# Altium PCB PCB1.PcbDoc
Units mil, origin at the board's own origin, x right, y up, seen from the top; angles counter-clockwise.
Board outline 6000 x 4000 mil, 2 copper layers (Top Layer, Bottom Layer); 95 components, 45 nets, 328 pads, 40 vias.
Unrouted connection lines stored in the file: 4.
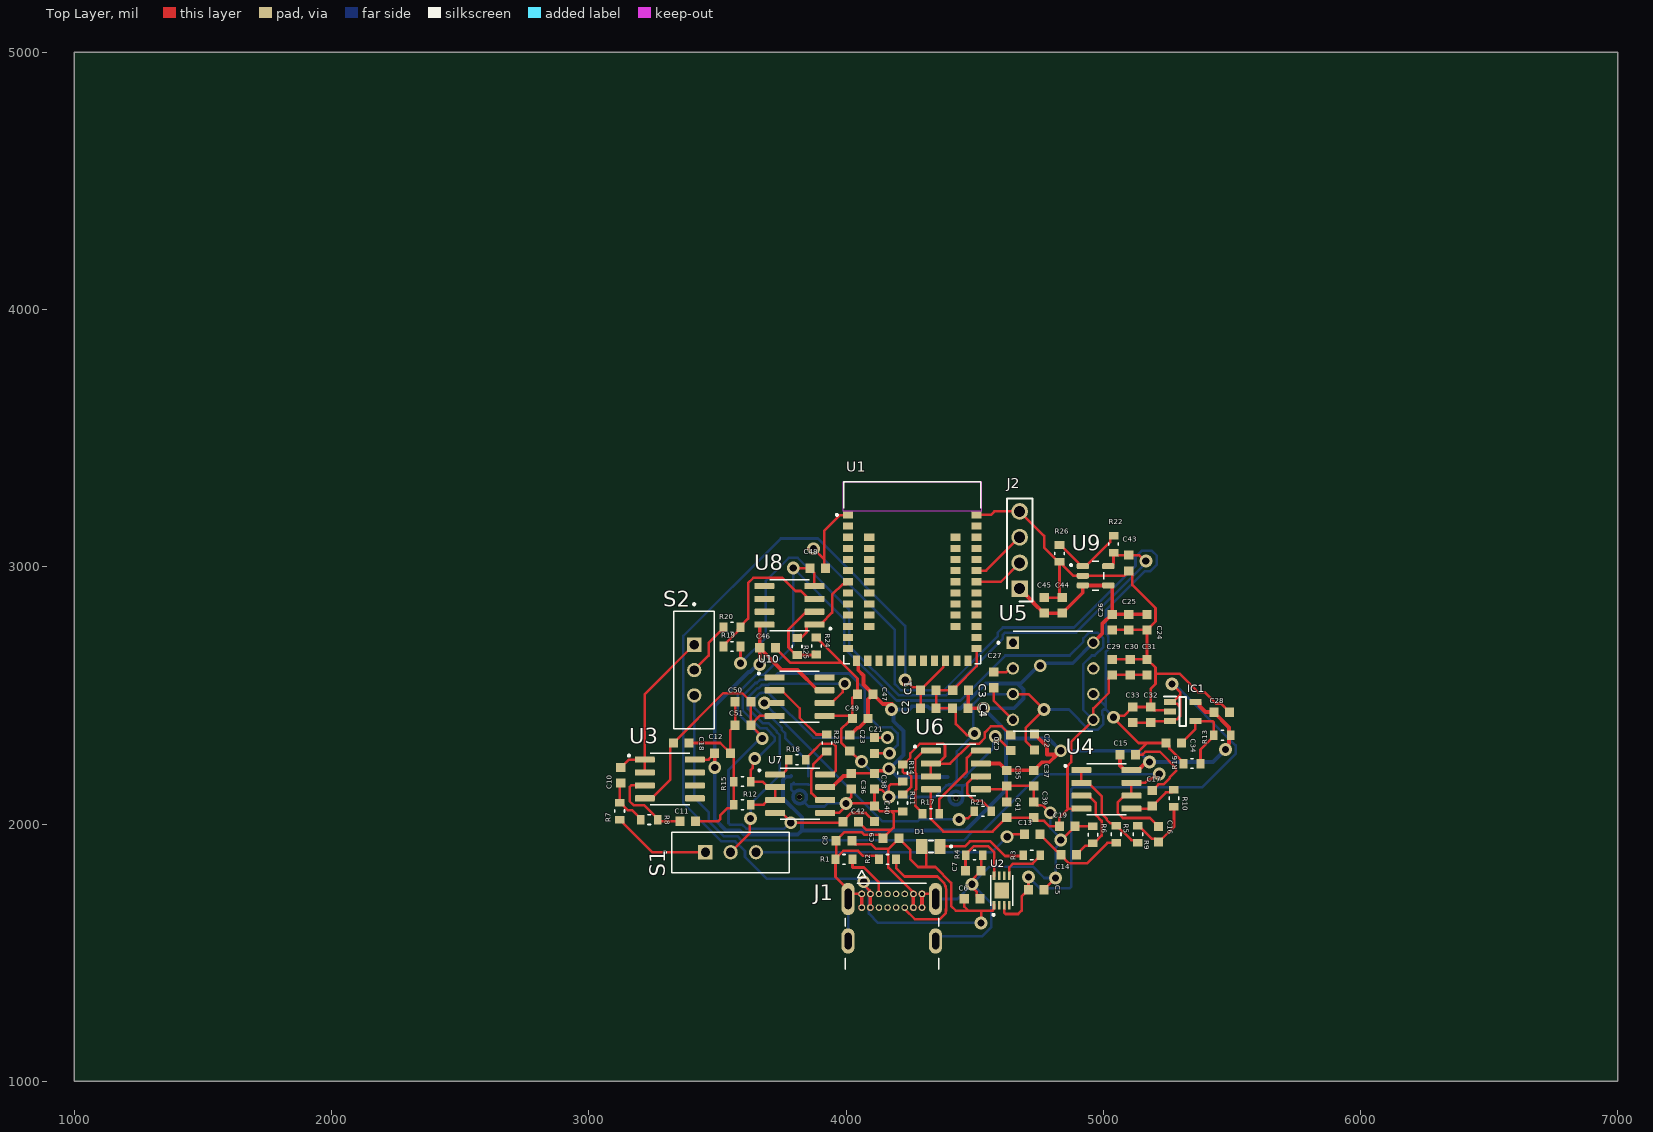
[diagram p0: Top Layer view]
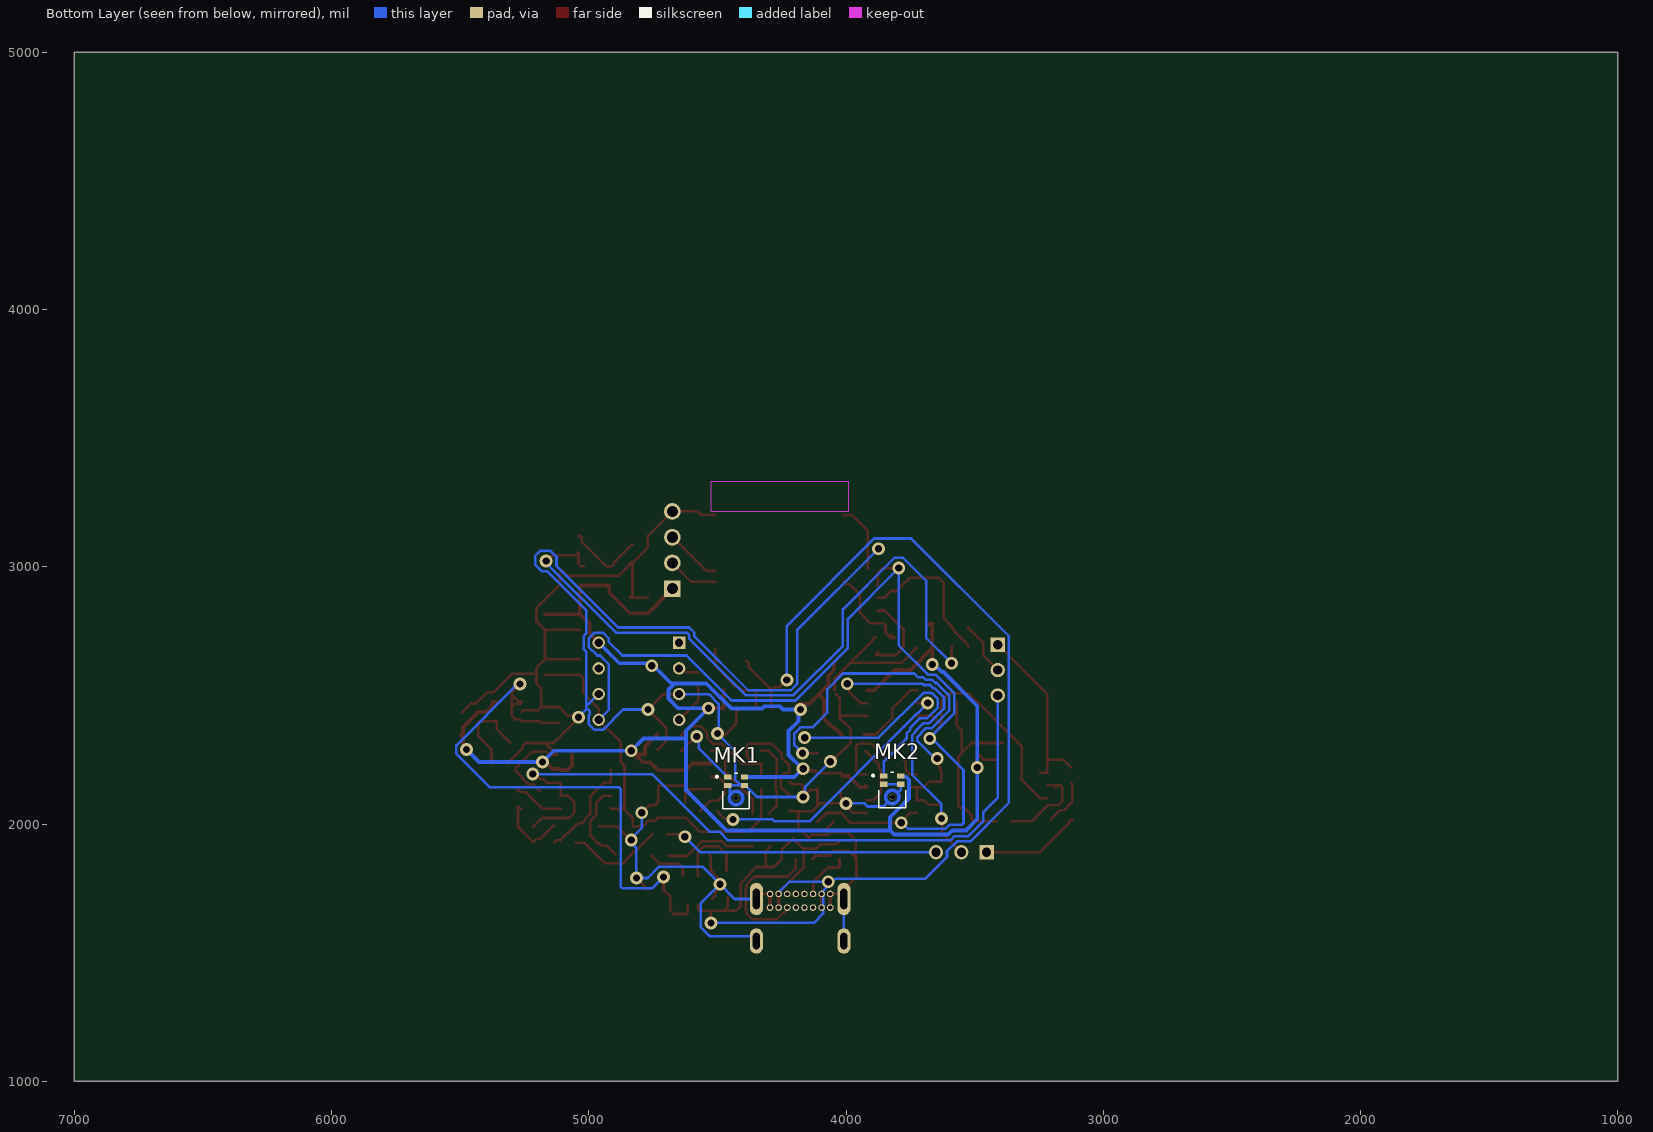
[diagram p1: Bottom Layer view, seen from below]
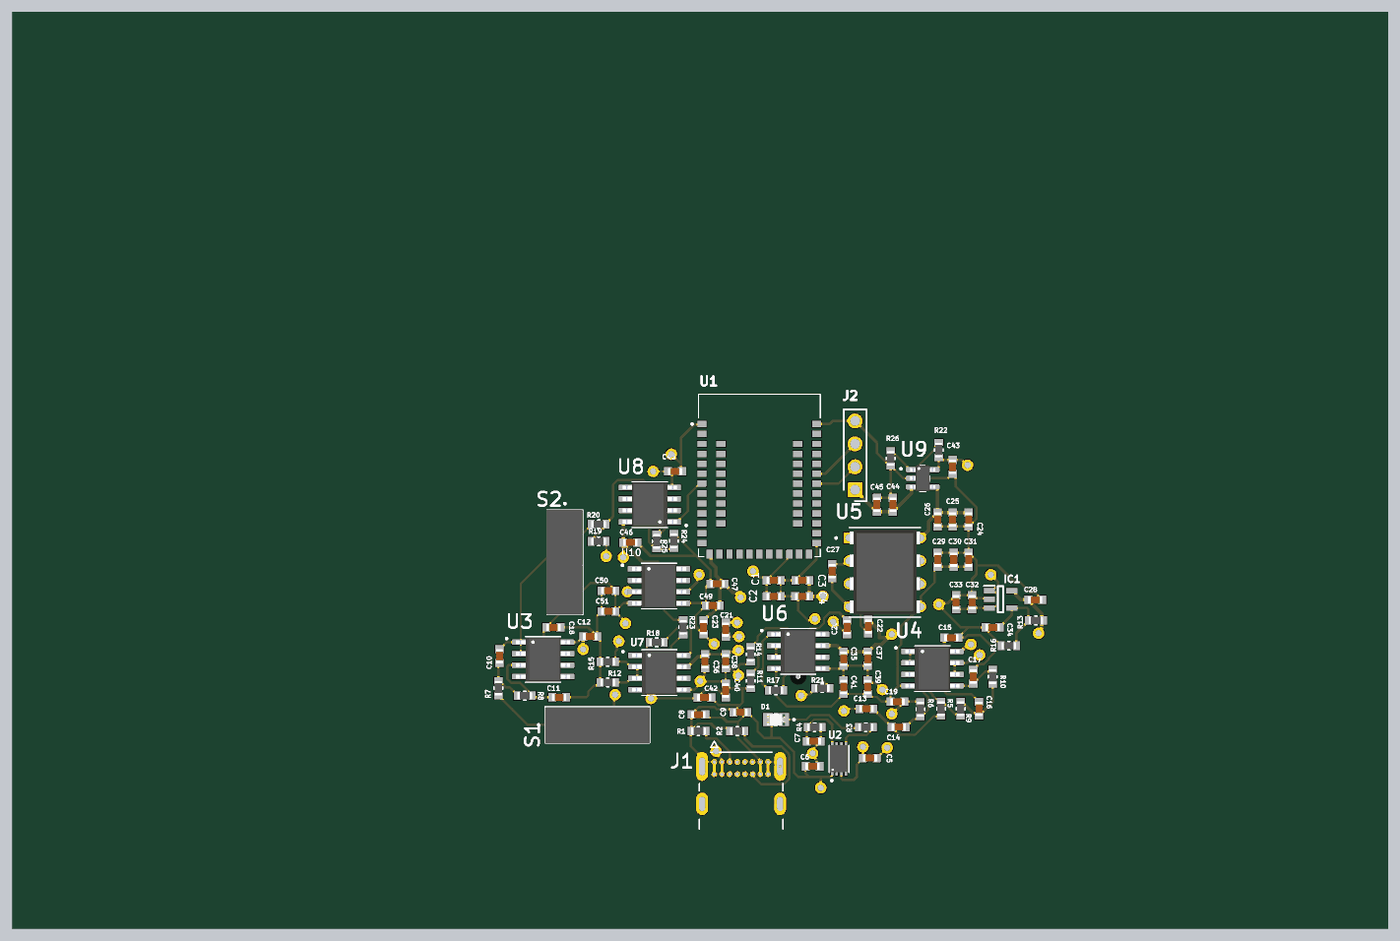
[diagram p2: 3D render of the assembled board from above, using the file's embedded part models]

## Layer stack, top to bottom
Top Solder: solder mask 0.4, Solder Resist, Dk 3.5
Top Layer: signal copper 1.4
Dielectric 1: dielectric 12.6, FR-4, Dk 4.8
Bottom Layer: signal copper 1.4
Bottom Solder: solder mask 0.4, Solder Resist, Dk 3.5

## Board outline
1000,1000 7000,1000 7000,5000 1000,5000

## Design rules (kind name [scope] priority, off if disabled: settings)
Clearance [All] p1: gap=10 ignorepadtopadclearanceinfootprint=FALSE
PolygonConnect [All] p1: connectstyle=Relief reliefconductorwidth=10 reliefentries=4 polygonreliefangle="90 Angle" airgapwidth=10
RoutingVias [All] p1: holewidth=28 width=50 viastyle="Through Hole" minholewidth=28 minwidth=50 maxholewidth=28 maxwidth=50
SolderMaskExpansion [All] p1: expansion=4 istentingtop=FALSE
SupplyNets "Schematic Supply Nets_5" [InNet('VDD_3.3V')] p1: voltage=0.000
SupplyNets "Schematic Supply Nets_4" [InNet('V_USB')] p2: voltage=0.000
SupplyNets "Schematic Supply Nets_3" [InNet('GND')] p3: voltage=0.000
SupplyNets "Schematic Supply Nets_2" [InNet('Ref')] p4: voltage=0.000
SupplyNets "Schematic Supply Nets_1" [InNet('V_BATT')] p5: voltage=0.000
SupplyNets "Schematic Supply Nets" [InNet('VDD_-3.3V')] p6: voltage=0.000
Width PowerN3.3 [InNet('VDD_3.3V')] p1: maxlimit=30 minlimit=15 preferedwidth=20 minimp=50.000000 maximp=50.000000 favimp=50.000000
Width Width_1 [All] p2: maxlimit=10 minlimit=10 preferedwidth=10
Width Power3.3 [InNet('VDD_3.3V')] p3: maxlimit=30 minlimit=15 preferedwidth=20 minimp=50.000000 maximp=50.000000 favimp=50.000000
30 further rules are at their usual default settings.

## Components (designator, comment, footprint, x,y, rotation, side; value= is the part's Value field where it differs from the comment)
C1 "1uF" CAPC1608X90N 4320.31,2520 r180 top
C2 "1uF" CAPC1608X90N 4320.31,2450 r180 top
C3 "1uF" CAPC1608X90N 4445.31,2520 r0 top
C4 "4.7uF" CAPC1608X90N 4444.69,2450 r0 top
C5 "4.7uF" CAPC1608X90N 4739.69,1745 r0 top
C6 "4.7uF" CAPC1608X90N 4490.04,1709.13 r180 top
C7 "10nF" CAPC1608X90N 4495,1818.29 r180 top
C8 "1uF" CAPC1608X90N 3992.3,1935 r0 top
C9 "1uF" CAPC1608X90N 4175,1945 r0 top
C10 "220nF" CAPC1608X90N 3125,2189.68 r270 top
C11 "100nF" CAPC1608X90N 3385,2010 r180 top
C12 "0.1uF" CAPC1608X90N 3520,2275 r180 top
C13 "10nF" CAPC1608X90N 4724.69,1960 r180 top
C14 "10nF" CAPC1608X90N 4865.31,1880 r180 top
C15 "10nF" CAPC1608X90N 5095,2270 r180 top
C16 "10nF" CAPC1608X90N 5215,1960 r90 top
C17 "10nF" CAPC1608X90N 5190,2100 r90 top
C18 "0.1uF" CAPC1608X90N 3360,2315 r0 top
C19 "10nF" CAPC1608X90N 4859.69,1991 r180 top
C20 "2.2uF" CAPC1608X90N 4640,2315.32 r270 top
C21 "2.2uF" CAPC1608X90N 4110.74,2305.32 r90 top
C22 "100nF" CAPC1608X90N 4732.72,2318.7 r90 top
C23 "100nF" CAPC1608X90N 4014.68,2315 r90 top
C24 "10uF" CAPC1608X90N 5170,2785 r90 top
C25 "10uF" CAPC1608X90N 5100,2785 r90 top
C26 "10uF" CAPC1608X90N 5035,2785 r90 top
C27 "10uF" CAPC1608X90N 4575,2560 r90 top
C28 "1uF" CAPC1608X90N 5460.31,2435 r0 top
C29 "10uF" CAPC1608X90N 5035,2610 r270 top
C30 "10uF" CAPC1608X90N 5105,2610 r270 top
C31 "10uF" CAPC1608X90N 5170,2610 r270 top
C32 "1uF" CAPC1608X90N 5185,2424.49 r90 top
C33 "10uF" CAPC1608X90N 5115,2424.49 r90 top
C34 "470pF" CAPC1608X90N 5274.69,2315 r180 top
C35 "1uF" CAPC1608X90N 4625,2178.41 r270 top
C36 "1uF" CAPC1608X90N 4021.13,2166.83 r270 top
C37 "0.1uF" CAPC1608X90N 4730,2178.41 r270 top
C38 "0.1uF" CAPC1608X90N 4110.74,2166.83 r270 top
C39 "1uF" CAPC1608X90N 4730,2054.68 r90 top
C40 "1uF" CAPC1608X90N 4110.74,2039.68 r90 top
C41 "0.1uF" CAPC1608X90N 4625,2054.68 r90 top
C42 "0.1uF" CAPC1608X90N 4017.96,2009.37 r0 top
C43 "0.022uF" CAPC1608X90N 5100,3014.68 r270 top
C44 "10uF" CAPC1608X90N 4840,2849.68 r90 top
C45 "1uF" CAPC1608X90N 4770,2849.68 r90 top
C46 "0.1uF" CAPC1608X90N 3695,2685 r180 top
C47 "1uF" CAPC1608X90N 4075,2505 r180 top
C48 "0.1uF" CAPC1608X90N 3890,2995 r180 top
C49 "0.1uF" CAPC1608X90N 4055,2410 r180 top
C50 "1uF" CAPC1608X90N 3599.68,2475 r180 top
C51 "0.1uF" CAPC1608X90N 3599.68,2384.68 r180 top
D1 "LED" LEDC2012X70N 4330,1912.71 r180 top
IC1 "MIC5219YM5-TR" SOT95P280X145-5N#1 5309.21,2437.4 r0 top
J1 "2137160001" MOLEX_2137160001 4178.27,1426.97 r0 top
J2 "90120-0764" HDRV4W90P0X254_1X4_994X249X560P 4675,2915 r90 top
MK1 "MP23ABS1TR" MIC_MP23ABS1TR 4427.34,2128.66 r180 bottom
MK2 "MP23ABS1TR" MIC_MP23ABS1TR 3820,2132.95 r180 bottom
R1 "5.1k" RESC1608X60N 3992.3,1862.4 r180 top
R2 "5.1k" RESC1608X60N 4161.54,1862.4 r0 top
R3 "470" RESC1608X60N 4722,1879.21 r180 top
R4 "2k" RESC1608X60N 4499,1879.21 r0 top
R5 "3.3k" RESC1608X60N 5050,1960 r270 top
R6 "3.3k" RESC1608X60N 4960,1958 r270 top
R7 "2.2k" RESC1608X60N 3120,2050 r270 top
R8 "3.3k" RESC1608X60N 3235,2017 r180 top
R9 "3.3k" RESC1608X60N 5135,1960 r270 top
R10 "3.3k" RESC1608X60N 5275,2100 r270 top
R11 "100k" RESC1608X60N 4220,2082 r270 top
R12 "100k" RESC1608X60N 3597,2075 r180 top
R13 "9.1k" RESC1608X60N 5463,2345 r180 top
R14 "100k" RESC1608X60N 4220,2198 r90 top
R15 "100k" RESC1608X60N 3597,2165 r0 top
R16 "15k" RESC1608X60N 5345,2235 r180 top
R17 "12k" RESC1608X60N 4330,2040.26 r0 top
R18 "12k" RESC1608X60N 3810,2250 r0 top
R19 "10k" RESC1608X60N 3557,2690 r180 top
R20 "1k" RESC1608X60N 3557,2765 r180 top
R21 "100k" RESC1608X60N 4532,2050 r0 top
R22 "2.4k" RESC1608X60N 5040,3088 r90 top
R23 "100k" RESC1608X60N 3925.85,2315 r90 top
R24 "1k" RESC1608X60N 3885,2692 r90 top
R25 "10k" RESC1608X60N 3810,2690 r270 top
R26 "6.5k" RESC1608X60N 4830,3052 r270 top
S1 "MINI-SPDT-SW" SW_MINI-SPDT-SW 3551.57,1890 r0 top
S2 "MINI-SPDT-SW" SW_MINI-SPDT-SW 3410,2598.43 r270 top
U1 "HOLYIOT-18010-NRF52840" XCVR_HOLYIOT-18010-NRF52840 4257.68,2977.05 r0 top
U2 "MCP73831-2ACI/MC" SON50P200X300X100-9N 4605.16,1741.5 r90 top
U3 "TL082CD" SOIC127P599X175-8N 3315,2175 r0 top
U4 "TL082CD" SOIC127P599X175-8N 5012.24,2135 r0 top
U5 "ICL7660EPA+" DIP794W47P254L991H457Q8 4805,2555 r0 top
U6 "INA818IDR" SOIC127P599X175-8N 4427.24,2210 r0 top
U7 "INA818IDR" SOIC127P599X175-8N 3821.93,2118.09 r0 top
U8 "TL082CD" SOIC127P599X175-8N 3780,2850 r180 top
U9 "LM4121IM5-ADJ/NOPB" SOT95P280X145-5N#2 4970,2965 r0 top
U10 "INA818IDR" SOIC127P599X175-8N 3820,2495 r0 top

## Footprints (in the part's own frame and the unit in brackets; to place one, negate y for a bottom-side part, rotate by r counter-clockwise, add the part's x,y. Pads: shape width x height; smd on the part's side, far side on the other; paste and mask are expansions set on the pad)
CAPC1608X90N [mm]
  rect 0.89x0.93 smd: 1(-0.77,0) 2(0.77,0)
  body extent -0.8,-0.4 0.8,0.4, height 0.9
DIP794W47P254L991H457Q8 [mm]
  rect 1.22x1.22 / inner round 1.22 / far side rect 1.22x1.22 hole 0.81: 1(-3.97,3.81)
  round 1.22 hole 0.81: 2(-3.97,1.27) 3(-3.97,-1.27) 4(-3.97,-3.81) 5(3.97,-3.81) 6(3.97,-1.27) 7(3.97,1.27) 8(3.97,3.81)
  silkscreen extent -5.51,-4.96 3.94,4.96, body extent -3.91,-4.69 3.91,4.69, height 4.57
HDRV4W90P0X254_1X4_994X249X560P [mm]
  rect 1.65x1.65 hole 1.1: 1(0,0)
  round 1.65 hole 1.1: 2(2.54,0) 3(5.08,0) 4(7.62,0)
  silkscreen extent -1.27,-1.27 8.89,1.27
LEDC2012X70N [mm]
  rect 1.1x1.45 smd: A(0.9,0) C(-0.9,0)
  silkscreen extent -2.1,-0.6 0.2,0.6, body extent -1,-0.63 1,0.63, height 0.7
MIC_MP23ABS1TR [mm]
  rect 0.725x0.522 smd paste-1: 1(-0.837,1.364) 2(-0.837,0.542) 4(0.837,0.542) 5(0.837,1.364)
  rect 0.1x0.1 smd paste-1 mask+0: 3(0,-1.372)
  round 0.5 hole 0.5 unplated mask+0.662: ""(0,-0.71)
  Top Layer region: 242 vertices and 0 holes, not listed, extent -0.813,-1.522 0.813,0.102
  silkscreen extent -2,-1.75 1.33,1.75, body extent -1.33,-1.75 1.33,1.75, height 1.08
MOLEX_2137160001 [mm]
  round 0.648 hole 0.4 mask+0.064: A1(-2.975,7.65) A4(-2.125,7.65) A5(-1.275,7.65) A6(-0.425,7.65) A7(0.425,7.65) A8(1.275,7.65) A9(2.125,7.65) A12(2.975,7.65) B1(2.975,6.3) B4(2.125,6.3) B5(1.275,6.3) B6(0.425,6.3) B7(-0.425,6.3) B8(-1.275,6.3) B9(-2.125,6.3) B12(-2.975,6.3)
  oval 1.3x2.5 hole 0.7 slot 1.6 at 90 deg mask+0.064: SH1(-4.32,3) SH2(4.32,3)
  oval 1.3x3.2 hole 0.7 slot 2 at 90 deg mask+0.064: SH3(-4.32,7.15) SH4(4.32,7.15)
  Top Layer region: -2.918,7.969 -2.863,7.954 -2.811,7.929 -2.764,7.896 -2.724,7.855 -2.692,7.808 -2.669,7.756 -2.655,7.7 -2.651,7.643 -2.657,7.586 -2.673,7.531 -2.699,7.48 -2.733,7.434 -2.775,7.395 -2.825,7.363 -2.825,6.587 -2.775,6.555 -2.733,6.516 -2.699,6.47 -2.673,6.419 -2.657,6.364 -2.651,6.307 -2.655,6.25 -2.669,6.194 -2.692,6.142 -2.724,6.095 -2.764,6.054 -2.811,6.021 -2.863,5.996 -2.918,5.981 -2.975,5.976 -3.032,5.981 -3.087,5.996 -3.139,6.021 -3.186,6.054 -3.226,6.095 -3.258,6.142 -3.281,6.194 -3.295,6.25 -3.299,6.307 -3.293,6.364 -3.277,6.419 -3.251,6.47 -3.217,6.516 -3.175,6.555 -3.125,6.587 -3.125,7.363 -3.175,7.395 -3.217,7.434 -3.251,7.48 -3.277,7.531 -3.293,7.586 -3.299,7.643 -3.295,7.7 -3.281,7.756 -3.258,7.808 -3.226,7.855 -3.186,7.896 -3.139,7.929 -3.087,7.954 -3.032,7.969 -2.975,7.974
  Top Layer region: -2.068,7.969 -2.013,7.954 -1.961,7.929 -1.914,7.896 -1.874,7.855 -1.842,7.808 -1.819,7.756 -1.805,7.7 -1.801,7.643 -1.807,7.586 -1.823,7.531 -1.849,7.48 -1.883,7.434 -1.925,7.395 -1.975,7.363 -1.975,6.587 -1.925,6.555 -1.883,6.516 -1.849,6.47 -1.823,6.419 -1.807,6.364 -1.801,6.307 -1.805,6.25 -1.819,6.194 -1.842,6.142 -1.874,6.095 -1.914,6.054 -1.961,6.021 -2.013,5.996 -2.068,5.981 -2.125,5.976 -2.182,5.981 -2.237,5.996 -2.289,6.021 -2.336,6.054 -2.376,6.095 -2.408,6.142 -2.431,6.194 -2.445,6.25 -2.449,6.307 -2.443,6.364 -2.427,6.419 -2.401,6.47 -2.367,6.516 -2.325,6.555 -2.275,6.587 -2.275,7.363 -2.325,7.395 -2.367,7.434 -2.401,7.48 -2.427,7.531 -2.443,7.586 -2.449,7.643 -2.445,7.7 -2.431,7.756 -2.408,7.808 -2.376,7.855 -2.336,7.896 -2.289,7.929 -2.237,7.954 -2.182,7.969 -2.125,7.974
  Top Layer region: 2.182,7.969 2.237,7.954 2.289,7.929 2.336,7.896 2.376,7.855 2.408,7.808 2.431,7.756 2.445,7.7 2.449,7.643 2.443,7.586 2.427,7.531 2.401,7.48 2.367,7.434 2.325,7.395 2.275,7.363 2.275,6.587 2.325,6.555 2.367,6.516 2.401,6.47 2.427,6.419 2.443,6.364 2.449,6.307 2.445,6.25 2.431,6.194 2.408,6.142 2.376,6.095 2.336,6.054 2.289,6.021 2.237,5.996 2.182,5.981 2.125,5.976 2.068,5.981 2.013,5.996 1.961,6.021 1.914,6.054 1.874,6.095 1.842,6.142 1.819,6.194 1.805,6.25 1.801,6.307 1.807,6.364 1.823,6.419 1.849,6.47 1.883,6.516 1.925,6.555 1.975,6.587 1.975,7.363 1.975,7.363 1.925,7.395 1.883,7.434 1.849,7.48 1.823,7.531 1.807,7.586 1.801,7.643 1.805,7.7 1.819,7.756 1.842,7.808 1.874,7.855 1.914,7.896 1.961,7.929 2.013,7.954 2.068,7.969 2.125,7.974
  Top Layer region: 3.032,7.969 3.087,7.954 3.139,7.929 3.186,7.896 3.226,7.855 3.258,7.808 3.281,7.756 3.295,7.7 3.299,7.643 3.293,7.586 3.277,7.531 3.251,7.48 3.217,7.434 3.175,7.395 3.125,7.363 3.125,6.587 3.175,6.555 3.217,6.516 3.251,6.47 3.277,6.419 3.293,6.364 3.299,6.307 3.295,6.25 3.281,6.194 3.258,6.142 3.226,6.095 3.186,6.054 3.139,6.021 3.087,5.996 3.032,5.981 2.975,5.976 2.918,5.981 2.863,5.996 2.811,6.021 2.764,6.054 2.724,6.095 2.692,6.142 2.669,6.194 2.655,6.25 2.651,6.307 2.657,6.364 2.673,6.419 2.699,6.47 2.733,6.516 2.775,6.555 2.825,6.587 2.825,7.363 2.775,7.395 2.733,7.434 2.699,7.48 2.673,7.531 2.657,7.586 2.651,7.643 2.655,7.7 2.669,7.756 2.692,7.808 2.724,7.855 2.764,7.896 2.811,7.929 2.863,7.954 2.918,7.969 2.975,7.974
  silkscreen extent -4.62,0.23 4.62,9.95
RESC1608X60N [mil]
  rect 30x37 smd: 1(-33,0) 2(33,0)
  silkscreen extent -5,-19 5,19, body extent -31,-16 31,16, height 22
SOIC127P599X175-8N [mm]
  rrect25% 1.97x0.6 smd: 1(-2.47,1.905) 2(-2.47,0.635) 3(-2.47,-0.635) 4(-2.47,-1.905) 5(2.47,-1.905) 6(2.47,-0.635) 7(2.47,0.635) 8(2.47,1.905)
  silkscreen extent -4.14,-2.52 1.95,2.52, body extent -3,-2.45 3,2.45, height 1.75
SON50P200X300X100-9N [mm]
  rrect7% 0.84x0.27 smd: 1(-1.435,0.75) 2(-1.435,0.25) 3(-1.435,-0.25) 4(-1.435,-0.75) 5(1.435,-0.75) 6(1.435,-0.25) 7(1.435,0.25) 8(1.435,0.75)
  rect 1.625x1.425 smd paste-2: 9(0,0)
  silkscreen extent -2.5,-1.1 1.5,1.1, body extent -1.5,-1 1.5,1, height 1
SOT95P280X145-5N#1 [mm]
  rect 1.2x0.6 smd: 1(-1.25,0.95) 2(-1.25,0) 3(-1.25,-0.95) 4(1.25,-0.95) 5(1.25,0.95)
  silkscreen extent -1.85,-1.45 0.3,1.5
SOT95P280X145-5N#2 [mm]
  rrect50% 1.21x0.59 smd: 1(-1.255,0.95) 2(-1.255,0) 3(-1.255,-0.95) 4(1.255,-0.95) 5(1.255,0.95)
  silkscreen extent -2.51,-1.45 0.8,1.45, body extent -1.4,-1.45 1.4,1.45, height 1.45
SW_MINI-SPDT-SW [mm]
  rect 1.408x1.408 hole 0.9: 1(-2.5,0)
  round 1.408 hole 0.9: 2(0,0) 3(2.5,0)
  silkscreen extent -6.6,-2 5.8,2, body extent -5.8,-2.03 5.8,1.97, height 7.4
XCVR_HOLYIOT-18010-NRF52840 [mm]
  rect 1x0.7 smd: 1(-6.35,5.7) 2(-6.35,4.6) 3(-6.35,3.5) 4(-6.35,2.4) 5(-6.35,1.3) 6(-6.35,0.2) 7(-6.35,-0.9) 8(-6.35,-2) 9(-6.35,-3.1) 10(-6.35,-4.2) 11(-6.35,-5.3) 12(-6.35,-6.4) 13(-6.35,-7.5) 25(6.35,-7.5) 26(6.35,-6.4) 27(6.35,-5.3) 28(6.35,-4.2) 29(6.35,-3.1) 30(6.35,-2) 31(6.35,-0.9) 32(6.35,0.2) 33(6.35,1.3) 34(6.35,2.4) 35(6.35,3.5) 36(6.35,4.6) 37(6.35,5.7) 38(-4.25,3.5) 39(-4.25,2.4) 40(-4.25,1.3) 41(-4.25,0.2) 42(-4.25,-0.9) 43(-4.25,-2) 44(-4.25,-3.1) 45(-4.25,-4.2) 46(-4.25,-5.3) 47(4.25,3.5) 48(4.25,2.4) 49(4.25,1.3) 50(4.25,0.2) 51(4.25,-0.9) 52(4.25,-2) 53(4.25,-3.1) 54(4.25,-4.2) 55(4.25,-5.3)
  rect 0.7x1 smd: 14(-5.5,-8.7) 15(-4.4,-8.7) 16(-3.3,-8.7) 17(-2.2,-8.7) 18(-1.1,-8.7) 19(0,-8.7) 20(1.1,-8.7) 21(2.2,-8.7) 22(3.3,-8.7) 23(4.4,-8.7) 24(5.5,-8.7)
  Keep-Out Layer region: 6.8,6.05 -6.8,6.05 -6.8,9 6.8,9
  Keep-Out Layer region: 6.8,6.05 -6.8,6.05 -6.8,9 6.8,9
  silkscreen extent -7.54,-9 6.75,9

## Part data
C1 C2 C3 C4 C5 C6 C7 C8 C9 C10 C11 C12 C13 C14 C15 C16 C17 C18 C19 C20 C21 C22 C23 C24 C25 C26 C27 C28 C29 C30 C31 C32 C33 C34 C35 C36 C37 C38 C39 C40 C41 C42 C43 C44 C45 C46 C47 C48 C49 C50 C51: library part CL10B104KB8NNNC, "0.1 ÂµF Â±10% 50V Ceramic Capacitor X7R 0603 (1608 Metric)", Package="1608-2 SAMSUNG", Check_prices=https://www.snapeda.com/parts/CL10B104KB8NNNC/Samsung/view-part/?ref=eda, MF="Samsung Electro-Mechanics", MP=CL10B104KB8NNNC, SnapEDA_Link=https://www.snapeda.com/parts/CL10B104KB8NNNC/Samsung/view-part/?ref=snap
D1: library part 597-5411-407F, "SMD LED 0805 YG 7", Package="0805 Dialight", Check_prices=https://www.snapeda.com/parts/597-5411-407F/Dialight/view-part/?ref=eda, MF=Dialight, MP=597-5411-407F, SnapEDA_Link=https://www.snapeda.com/parts/597-5411-407F/Dialight/view-part/?ref=snap
IC1: "Integrated Circuit", Manufacturer_Name=Microchip, Mouser Part Number=998-MIC5219YM5TR, Arrow Part Number=MIC5219YM5-TR, Arrow Price/Stock=https://www.arrow.com/en/products/mic5219ym5-tr/microchip-technology?utm_currency=USD&region=nac, Datasheet Link=http://www.microchip.com/mymicrochip/filehandler.aspx?ddocname=en579712, Height=1.45mm, Manufacturer_Part_Number=MIC5219YM5-TR, Mouser Price/Stock=https://www.mouser.co.uk/ProductDetail/Microchip-Technology/MIC5219YM5-TR?qs=U6T8BxXiZAWfHDmqF70%2FoQ%3D%3D
J1: "USB-C (USB TYPE-C) USB 2.0 Receptacle Connector 24 (16+8 Dummy) Position Through Hole, Right Angle", Package=None, Check_prices=https://www.snapeda.com/parts/2137160001/Molex/view-part/?ref=eda, MF=Molex, MP=2137160001, SnapEDA_Link=https://www.snapeda.com/parts/2137160001/Molex/view-part/?ref=snap
J2: "Connector", Manufacturer_Name=Molex, Mouser Part Number=538-90120-0764, Datasheet Link=https://www.molex.com/webdocs/datasheets/pdf/en-us/0901200764_PCB_HEADERS.pdf, Height=5.6mm, Manufacturer_Part_Number=90120-0764, Mouser Price/Stock=https://www.mouser.co.uk/ProductDetail/Molex/90120-0764?qs=QSnLD11VNirsMTdnHEPG3Q%3D%3D
MK1 MK2: "35 Hz ~ 1.5 kHz Analog Microphone MEMS (Silicon) Omnidirectional (-38dB Â±1dB @ 94dB SPL) Solder Pads", Package=None, Check_prices=https://www.snapeda.com/parts/MP23ABS1TR/STMicroelectronics/view-part/?ref=eda, MF=STMicroelectronics, MP=MP23ABS1TR, SnapEDA_Link=https://www.snapeda.com/parts/MP23ABS1TR/STMicroelectronics/view-part/?ref=snap
R1 R2 R3 R4 R5 R6 R7 R8 R9 R10 R11 R12 R13 R14 R15 R16 R17 R18 R19 R20 R21 R22 R23 R24 R25 R26: library part RC0603FR-0751RL, "51 Ohms Â±1% 0.1W, 1/10W Chip Resistor 0603 (1608 Metric) Moisture Resistant Thick Film", Package="0603-2 YAGEO", Check_prices=https://www.snapeda.com/parts/RC0603FR0751RL/Yageo/view-part/?ref=eda, MF="Yageo Corporation", MP=RC0603FR0751RL, SnapEDA_Link=https://www.snapeda.com/parts/RC0603FR0751RL/Yageo/view-part/?ref=snap
S1 S2: "Simple breadboard friendly SPDT slide switch. Rated at 30V/200mA with operating force of 250 +/-100gf.", Package=None, Availability=Unavailable, MP=MINI-SPDT-SW, Price=None
U1: "Holyiot 18010 Nordic nRF52840 module Bluetooth low energy module", Package=Package, Check_prices=https://www.snapeda.com/parts/HOLYIOT-18010-NRF52840/Holyiot/view-part/?ref=eda, MF=Holyiot, MP=HOLYIOT-18010-NRF52840, SnapEDA_Link=https://www.snapeda.com/parts/HOLYIOT-18010-NRF52840/Holyiot/view-part/?ref=snap
U2: "Charge Controller Li-Ion/Li-Pol 15mA to 500mA 4.2V 8-Pin DFN EP", Package="VFDFN-8 Microchip", Check_prices=https://www.snapeda.com/parts/MCP73831-2ACI/MC/Microchip/view-part/?ref=eda, MF=Microchip, MP=MCP73831-2ACI/MC, SnapEDA_Link=https://www.snapeda.com/parts/MCP73831-2ACI/MC/Microchip/view-part/?ref=snap
U3 U4 U8: "Dual, 30-V, 3-MHz, 13-V/Âµs slew rate, In to V+, JFET-input op amp", Package="SOIC-8 Texas Instruments", Check_prices=https://www.snapeda.com/parts/TL082CD/Texas+Instruments/view-part/?ref=eda, MF="Texas Instruments", MP=TL082CD, SnapEDA_Link=https://www.snapeda.com/parts/TL082CD/Texas+Instruments/view-part/?ref=snap
U5: "Switched-Capacitor Voltage Converters", Package="PDIP-8 Maxim", Availability="In Stock", Check_prices=https://www.snapeda.com/parts/ICL7660EPA+/Analog+Devices/view-part/?ref=eda, MF="Analog Devices", MP=ICL7660EPA+, Price=None, Purchase-URL=https://pricing.snapeda.com/search/part/ICL7660EPA+/?ref=eda, SnapEDA_Link=https://www.snapeda.com/parts/ICL7660EPA+/Analog+Devices/view-part/?ref=snap
U6 U7 U10: "Low power (350-ÂµA), precision instrumentation amp with Â±60-V overvoltage protection (gain pins 1, 8)", Package="SOIC-8 Texas Instruments", Check_prices=https://www.snapeda.com/parts/INA818IDR/Texas+Instruments/view-part/?ref=eda, MF="Texas Instruments", MP=INA818IDR, SnapEDA_Link=https://www.snapeda.com/parts/INA818IDR/Texas+Instruments/view-part/?ref=snap
U9: "Fixed & adjustable-voltage, 0.2% 50-ppm/Â°C drift precision series voltage reference with enable pin", Package="SOT-23-5 Texas Instruments", Check_prices=https://www.snapeda.com/parts/LM4121IM5-ADJ/NOPB/Texas+Instruments/view-part/?ref=eda, MF="Texas Instruments", MP=LM4121IM5-ADJ/NOPB, SnapEDA_Link=https://www.snapeda.com/parts/LM4121IM5-ADJ/NOPB/Texas+Instruments/view-part/?ref=snap

## Via types
v1: diameter 50, hole 28, Top Layer to Bottom Layer, 40 vias

## Nets (pads, with @x,y where several pads share a name; then routed paths per layer and width w, separated by ;. In a path a pad name is that pad's centre, name@x,y a point inside that pad or via, vN(x,y) a via of type N, cw(c..) or ccw(c..) an arc to the next point about the centre after c; other vN are vias at no path point)
+IN1: C20.1 R11.1 R14.2 U6.2 U6.3 | length 892.3
  Top Layer w10: R11.1 4223.5,2115 4243.5,2135 4244.71,2135 4253.5,2143.79 4253.5,2186.21 4241.72,2198 4225.86,2198 4220,2203.86 R14.2 ; R14.2@4223.5,2231 4250,2257.5 4250,2275.07 4286.74,2311.81 4378.19,2311.81 4385,2305 4385,2263.03 U6.2@4356.97,2235 ; U6.3 U6.2 U6.2@4356.97,2235 ; C20.1 4639.21,2345.63 4604.84,2380 4563.43,2380 4540,2356.57 4540,2335.24 4516.57,2311.81 4481.22,2311.81 4404.41,2235 U6.2@4356.97,2235
+IN2: C21.1 R12.1 R15.2 U7.2 U7.3 | length 1661.9
  Top Layer w10: R12.1 3679.63,2075 3697.72,2093.09 U7.3 U7.2 ; v1(3645,2255) 3637.35,2247.35 3637.35,2217.35 3630,2210 R15.2 3675.81,2165 3697.72,2143.09 U7.2 ; U7.2@3751.65,2143.09 U7.2 ; C21.1 v1(4169.37,2275)
  Bottom Layer w10: v1(3645,2255) 3654.06,2255 3723.14,2324.08 3723.14,2336.72 3710,2349.85 3710,2352.68 3690.87,2371.81 3667.57,2371.81 3599.07,2440.31 3599.07,2499.69 3647.55,2548.16 3652.64,2548.16 3664.79,2560.32 3689.54,2560.32 3699.22,2570 3719.23,2570 3734.23,2585 4011.57,2585 4072.89,2523.68 4072.89,2432.74 4130,2375.63 4177.2,2375.63 4200.63,2352.2 4200.63,2306.26 v1(4169.37,2275)
"+IN SUB": R21.2 U6.6 | length 265.8
  Top Layer w10: U6.6@4510.43,2178.19 U6.6@4517.24,2185 ; R21.2 4565,2053.5 4527.4,2091.1 4498.31,2091.1 4470.71,2118.71 4470.71,2158.19 U6.6@4497.52,2185 ; U6.6@4497.52,2185 U6.6 U6.6@4517.24,2185 ; U6.6@4497.52,2185 U6.6@4517.24,2185
"-IN SUB": R23.1 U7.6 | length 254.1
  Top Layer w10: U7.6 3892.2,2093.09 3865.39,2119.9 3865.39,2209.39 3873,2216.99 3873,2232.65 3922.35,2282 R23.1
GND: C1.1 C2.1 C3.1 C4.1 C5.2 C6.1 C7.1 C8.1 C9.1 C11.1 C12.1 C15.1 C17.2 C18.2 C19.1 C22.1 C23.1 C24.1 C25.1 C26.1 C28.2 C29.1 C30.1 C31.1 C32.2 C33.2 C34.2 C35.2 C36.2 C37.2 C38.2 C39.2 C40.2 C41.2 C42.2 C43.2 C44.2 C45.2 C46.1 C47.2 C48.1 C49.2 C50.2 C51.2 IC1.2 J1.A1 J1.A12 J1.B1 J1.B12 J1.SH1 J1.SH2 J1.SH3 J1.SH4 J2.4 MK1.2 MK1.3 MK1.4 MK2.2 MK2.3 MK2.4 R1.2 R2.1 R4.2 R6.1 R11.2 R12.2 R14.1 R15.1 R16.2 R24.2 R26.2 U1.1 U1.25 U1.37 U2.6 U5.3 U5.6 U6.5 U7.5 U9.2 U10.5 | length 14584.8
  Top Layer w10: C18.2 3511.1,2315 C12.1@3550.32,2275.79 ; C11.1 3502.5,2010 3511.57,2019.07 3511.57,2034.29 3538.79,2061.5 3554,2061.5 R12.2@3564,2071.5 ; R12.2 R15.1 3564,2260.53 3550.32,2274.21 C12.1 C12.1@3550.32,2275.79 ; C50.2 C51.2 3569.37,2383.9 3550.32,2364.84 C12.1@3550.32,2275.79 ; C46.1 3725.32,2684.21 3782.53,2627 3983,2627 ; v1(3873.86,3070) 3915.63,3028.23 ; R24.2 3888.5,2725 3898.5,2715 3898.5,2711.5 3983,2627 ; C48.1@3915.63,2995 3915.63,3028.23 ; U10.5 4014.68,2420 C49.2 ; U7.5 3973.27,2043.09 4000,2069.82 v1(4000,2080) ; U1.1@4007.68,3200.24 4008.9,3200.24 4009.13,3200 3975,3200 3915.63,3140.63 3915.63,3028.23 ; J1.SH3 4008.19,1745.87 3959.3,1794.75 R1.2 ; J1.SH3@4008.19,1709.13 4027.21,1728.15 J1.A1 ; C36.2 4020,2135.39 4020,2104.34 4000,2084.34 v1(4000,2080) ; C47.2@4039.37,2505 4024.68,2490.32 C49.2 ; C47.2@4044.68,2520.47 4044.68,2565.32 3983,2627 ; C42.2 4048.28,2008.58 4080.01,1976.85 4175.75,1976.85 ; v1(4060.88,2242.33) 4057.83,2242.33 4015.47,2284.68 4013.9,2284.68 3981.38,2317.2 3981.38,2369.05 4009.02,2396.69 4012.17,2396.69 4024.68,2409.21 C49.2 ; R2.1 4128.54,1865.9 4118.54,1875.9 4066.52,1875.9 4046.52,1895.9 3989.3,1895.9 3959.3,1865.9 R1.2 ; C9.1 C9.1@4144.69,1945.79 ; R11.2 4176.26,2049 ; R14.1 4210,2155 4174.51,2155 4166.52,2147 v1(4166.5,2105) 4138.22,2133.29 4113.97,2133.29 C38.2 C40.2 ; J1.A12 4329.32,1728.15 4348.35,1709.13 J1.SH4 ; v1(4500,2351.81) 4493.82,2345.63 4469.69,2345.63 4426.89,2388.43 4426.89,2437.48 C4.1 C2.1 C1.1 4405,2520 4418.31,2533.31 4427.67,2533.31 4507.68,2613.31 U1.25 ; U1.37 4563.54,3201.46 4577.09,3215 J2.4 4770,3120 4770,3075.5 4826.5,3019 R26.2 ; C7.1@4520.31,1814.08 C7.1@4525.31,1819.08 ; C6.1 4507.83,1721.65 4507.83,1737.25 4490.04,1755.05 v1(4490.04,1765.87) 4490.04,1766.52 4481.79,1774.77 C7.1 4525.31,1872.53 R4.2 ; U6.5 4611.12,2135 4624.21,2148.09 C35.2 ; C41.2 C35.2 ; U5.3 4710,2505 v1(4770,2445) 4699.41,2374.41 4699.41,2320.91 4731.93,2288.39 C22.1 ; C5.2 v1(4815,1790) ; C45.2 C44.2 4830,2890 R26.2 ; v1(4794.07,2043.53) 4765.12,2072.48 4742.52,2072.48 C39.2 C37.2 C35.2 ; v1(4835,1937.69) 4837.48,1937.69 4890,1990.21 C19.1 R6.1 ; C29.1 C30.1 C31.1 ; C26.1 C25.1 C24.1 ; C17.2 5190.79,2130.32 5214.69,2154.21 5234.45,2154.21 5257.89,2177.64 5257.89,2181.32 5284.67,2208.11 5284.67,2216.39 5220.14,2280.92 5163.66,2280.92 5152.74,2270 C15.1 5125.31,2270.79 5137.83,2283.31 5138.62,2283.31 5170.31,2315 ; IC1.2 5255.12,2442.28 5198.31,2442.28 5185.79,2454.8 C32.2 ; R16.2 5312,2238.5 5256.89,2293.61 5256.89,2302.48 C34.2 5170.31,2315 ; C28.2 5490.63,2435.79 5458.11,2468.31 5438.53,2468.31 5394.13,2512.71 5368.87,2512.71 5297.06,2584.52 5208.15,2584.52 5203.31,2579.68 ; R1.2 3961.99,1865.09 C8.1 3961.99,1935.79 3994.51,1968.31 4060.53,1968.31 4070.53,1958.31 4132.17,1958.31 C9.1@4144.69,1945.79 ; v1(4000,2080) 4100.74,2080 C40.2 ; C40.2 4111.53,2070 4132.53,2049 4176.26,2049 ; C9.1@4144.69,1945.79 4175.75,1976.85 ; 4175.75,1976.85 4185,1986.1 4185,2040.26 4176.26,2049 ; R26.2 4833.5,3019 4843.5,3009 4843.5,3005.5 4884,2965 U9.2 5079.84,2965 5099.21,2984.37 C43.2 5100.79,2984.37 5113.31,2971.85 5113.31,2929.05 5203.31,2839.05 5203.31,2787.2 5170.79,2754.68 C24.1 ; C31.1 5170.79,2640.32 5203.31,2607.8 5203.31,2579.68 ; C31.1 C24.1 ; 5170.31,2315 5137.13,2315 5040,2412.13 v1(5040,2415) 5045.59,2420.59 5080,2420.59 5114.21,2454.8 C33.2 C32.2 ; C32.2 5185,2526.22 5203.31,2544.52 5203.31,2579.68
  Bottom Layer w10: MK2.4@3796.3,2159.57 3795.16,2158.43 MK2.4@3795.16,2154.29 ; 3800.19,2120.32 3787.03,2133.48 MK2.4 MK2.4@3795.16,2154.29 ; 3834.61,2084.48 3838.2,2084.48 3854.71,2067.96 3915.93,2067.96 3927.96,2080 v1(4000,2080) ; MK2.2@3855.12,2152.15 MK2.2 MK2.4@3795.16,2154.29 ; v1(3873.86,3070) 4190,2753.86 4190,2543.43 4213.43,2520 4380,2520 4589.69,2729.68 4589.69,2743.51 4610.19,2764.02 4886.43,2764.02 5125.55,3003.14 5125.55,3038.69 5148.99,3062.12 5189.39,3062.12 5208.68,3042.83 5208.68,3008.67 5182.12,2982.12 5161.1,2982.12 5010,2831.02 5010,2739.76 5020.31,2729.45 5020.31,2680.55 5010,2670.24 5010,2456.3 ; J1.SH1 J1.SH3 ; v1(4060.88,2242.33) 4158.85,2144.36 4158.85,2112.65 v1(4166.5,2105) 4345.37,2105 4390.37,2150 MK1.4 ; J1.SH2 4366.97,1563.7 4530.27,1563.7 4565.31,1598.75 4565.31,1690.59 v1(4490.04,1765.87) ; J1.SH4 4432.63,1708.46 v1(4490.04,1765.87) ; 4447.86,2115.32 4452.56,2120.02 4452.56,2144.72 4457.83,2150 MK1.2 ; MK1.2@4465.59,2155.28 MK1.2 ; U5.3 4533.43,2505 4495,2466.57 4495,2356.81 v1(4500,2351.81) 4431.04,2282.85 4431.04,2173.27 4413.04,2155.28 4399.65,2155.28 MK1.4 ; v1(4770,2445) 4866.12,2445 4945.14,2365.98 4977.46,2365.98 5000.31,2388.84 5000.31,2421.16 4995.86,2425.62 4995.86,2439.14 5001.72,2445 5010,2445 ; v1(4794.07,2043.53) 4794.07,1983.62 4835,1942.69 v1(4835,1937.69) ; v1@4837.5,1940.19 4837.5,1929.37 4815,1906.87 v1(4815,1790) 4770.67,1790 4726.3,1834.37 4558.54,1834.37 v1(4490.04,1765.87) ; U5.6 5010,2456.3 ; v1(5040,2415) 5010,2445 ; MK1.4 MK1.2 ; 5010,2445 5010,2456.3
INA1: R7.2 S1.1 | length 387.8
  Top Layer w10: R7.2 3123.5,2017 3133.5,2007 3133.5,2003.5 3247,1890 S1.1
INA2: C13.2 S1.3 | length 1073.4
  Top Layer w10: v1(4626.48,1950.34) 4636.14,1960 C13.2
  Bottom Layer w10: S1.3 4566.14,1890 v1(4626.48,1950.34)
NetC7_2: C7.2 R4.1 U2.8 | length 288.9
  Top Layer w10: C7.2 4464.69,1877.9 R4.1 4466,1882.71 4496,1912.71 4553.21,1912.71 4575.63,1890.3 U2.8 U2.8@4575.31,1797.99
NetC10_2: C10.2 R7.1 R8.2 | length 189.8
  Top Layer w10: C10.2 3120,2154.37 R7.1 3123.5,2083 3153.31,2053.19 3169.31,2053.19 3202,2020.5 R8.2
NetC11_2: C11.2 R8.1 U3.3 | length 368.8
  Top Layer w10: U3.3@3183.98,2143.19 U3.3@3190.79,2150 ; U3.3 U3.3@3190.79,2150 ; C11.2@3342.17,2010 C11.2 3275,2010 R8.1 3268,2020.5 3215.31,2073.19 3174.49,2073.19 3159.26,2088.42 3159.26,2144.14 3165.12,2150 U3.3@3190.79,2150
NetC13_1: C13.1 C14.2 R5.2 | length 375.8
  Top Layer w10: C13.1 4755,1959.21 4820.91,1893.31 4822.48,1893.31 4835,1880.79 C14.2 ; C14.2@4835,1879.21 4867.52,1846.69 4936.41,1846.69 5016.71,1927 R5.2
NetC14_1: C14.1 R6.2 U4.3 | length 332.7
  Top Layer w10: C14.1 4895.63,1880.79 4929.84,1915 4950,1915 R6.2 4963.5,1925 4993.5,1955 4993.5,2012.21 4971.14,2034.57 4971.14,2080.83 4941.97,2110 U4.3
NetC16_1: C16.1 R9.1 R10.2 | length 286.5
  Top Layer w10: R9.1 5138.5,1993 5189.3,1942.2 5202.48,1942.2 C16.1 5215.79,1929.68 5275,1988.9 R10.2 5271.5,2067 R10.2@5261.5,2057
NetC17_1: C17.1 R10.1 U4.5 | length 199.2
  Top Layer w10: U4.5 5180.31,2060 C17.1 5190.79,2069.68 5244.1,2123 5265,2123 R10.1 R10.1@5278.5,2133
NetC20_2: C20.2 MK1.1 | length 292.3
  Top Layer w10: v1(4580,2340) 4584.21,2340 4639.21,2285 C20.2
  Bottom Layer w10: MK1.1 4464.31,2182.36 4469.59,2187.64 4469.59,2191.63 4572.95,2295 4572.95,2332.95 v1(4580,2340)
NetC21_2: C21.2 MK2.1 | length 1053.9
  Top Layer w10: C21.2 v1(4160.63,2335.63)
  Bottom Layer w10: MK2.1 3852.97,2243.6 3763.14,2333.43 3763.14,2353.28 3750,2366.42 3750,2374.85 3713.04,2411.81 3684.14,2411.81 3642.52,2453.43 3642.52,2486.57 3664.12,2508.16 3669.21,2508.16 3671.04,2510 3699.09,2510 3873.46,2335.63 v1(4160.63,2335.63)
NetC27_1: C27.1 U5.4 | length 155.2
  Top Layer w10: C27.1 4575,2478.7 U5.4
NetC27_2: C27.2 U5.2 | length 79.8
  Top Layer w10: C27.2 4623.72,2590.32 4638.41,2605 U5.2
NetC34_1: C34.1 IC1.4 R13.2 R16.1 | length 361.8
  Top Layer w10: C34.1 5305,2315.79 5358.43,2369.21 IC1.4 5424.14,2400 5430,2394.14 R13.2 5430,2341.5 5378,2289.5 R16.1
NetD1_C: D1.C R3.2 | length 356.9
  Top Layer w10: D1.C 4461.79,1912.71 4481.79,1932.71 4561.5,1932.71 4618.5,1875.71 4685.5,1875.71 R3.2
NetJ1_A5: J1.A5 R1.1 | length 207.2
  Top Layer w10: R1.1 4025.3,1830.92 4069.98,1830.92 4128.07,1772.82 J1.A5 J1.A5@4125.1,1731.12
NetJ1_B5: J1.B5 R2.2 | length 553.6
  Top Layer w10: R2.2 4194.54,1828.9 4227.65,1795.79 4355.83,1795.79 4377,1774.62 cw(c4348.35,1745.87) 4388.94,1745.87 4388.94,1671.06 cw(c4348.35,1671.06) 4388.73,1666.96 4387.27,1652.58 4384.66,1649.97 4365.16,1630.47 4267.2,1630.47 4231.43,1666.24 4231.43,1672.03 J1.B5
NetR3_1: R3.1 U2.5 | length 175.7
  Top Layer w10: U2.5 4634.69,1831.6 4648.8,1845.71 4725,1845.71 4755,1875.71 R3.1
NetR17_1: R17.1 U6.1 | length 299.5
  Top Layer w10: R17.1 4297,2043.76 4270,2070.76 4270,2132 4273.5,2135.5 4273.5,2194.5 4270,2198 4270,2251.97 4303.03,2285 U6.1
NetR17_2: R17.2 U6.8 | length 327.4
  Top Layer w10: R17.2 4363,2097.93 4469.69,2204.62 4469.69,2257.17 4497.52,2285 U6.8
NetR18_1: R18.1 U7.1 | length 94.4
  Top Layer w10: U7.1 3751.65,2193.09 3767,2208.44 3767,2240 R18.1
NetR18_2: R18.2 U7.8 | length 290.5
  Top Layer w10: R18.2 3843,2253.5 3877.07,2287.57 3877.07,2287.93 3901.13,2312 3950.56,2312 3959.35,2303.21 3959.35,2206.3 3946.14,2193.09 U7.8
NetR19_2: R19.2 R20.1 U8.3 | length 584.2
  Top Layer w10: R19.2 3524,2693.5 3580,2749.5 3580,2755 R20.1 3590,2768.5 3619.75,2798.25 3619.75,2937.06 3639.49,2956.81 3752.83,2956.81 3803.89,2905.76 3824.52,2905.76 3850.28,2880 U8.3@3877.24,2880
NetR21_1: R21.1 U10.3 | length 1066.2
  Top Layer w10: v1(3682.52,2470) U10.3 ; v1(4439.63,2017.72) 4444.27,2022.36 4474.86,2022.36 4499,2046.5 R21.1
  Bottom Layer w10: v1(3682.52,2470) 3722.52,2430 3723.14,2430 3770,2383.14 3770,2382.52 4142.52,2010 4277.98,2010 4285.69,2017.72 v1(4439.63,2017.72)
NetR22_2: R22.2 R26.1 U9.1 | length 306.3
  Top Layer w10: R26.1 4833.5,3085 4902.27,3016.23 4902.27,3008.95 4908.82,3002.4 U9.1 4932.69,3002.4 5026.5,3096.21 5026.5,3111 5036.5,3121 R22.2
NetR23_2: R23.2 U10.2 | length 299.3
  Top Layer w10: U10.2 3749.72,2520 3820.27,2449.46 3820.27,2412.86 3885.13,2348 R23.2 R23.2@3929.35,2348
NetR24_1: R24.1 R25.2 U8.2 | length 336.4
  Top Layer w10: R24.1@3875,2669 R24.1 3883,2657 R25.2 3806.5,2657 3776.5,2687 3776.5,2756.22 3850.28,2830 U8.2@3877.24,2830
OUT: R20.2 S2.2 | length 227.9
  Top Layer w10: S2.2 3466.35,2654.77 3466.35,2703.85 R20.2@3524,2761.5 ; R20.2@3514,2751.5 R20.2@3524,2761.5 ; R20.2 R20.2@3524,2761.5
"OUT A": R5.1 R9.2 U4.1 U4.2 | length 408.7
  Top Layer w10: U4.1 U4.2 4941.97,2160 4995,2106.97 4995,2039 5013.5,2020.5 5013.5,2016.5 5027,2003 5040,2003 R5.1 5053.5,1993 5109.5,1937 5125,1937 R9.2
"OUT KD": S1.2 U10.6 | length 1266.9
  Top Layer w10: S1.2 3625,1963.43 3625,2017.52 v1(3628.98,2021.5) ; U10.6 3944.21,2470 3987.35,2513.13 3987.35,2537.35 v1(3995,2545)
  Bottom Layer w10: v1(3628.98,2021.5) 3628.98,2077.36 3743.14,2191.52 3743.14,2345 3730,2358.14 3730,2360.96 3699.15,2391.81 3675.86,2391.81 3619.07,2448.6 3619.07,2491.4 3655.83,2528.16 3660.92,2528.16 3673.07,2540.32 3697.82,2540.32 3702.51,2545 v1(3995,2545)
OUT_H: C10.1 S2.1 U3.1 U3.2 | length 709.4
  Top Layer w10: C10.1@3124.21,2220 C10.1 3125.79,2220 3155.79,2250 U3.1 ; U3.2@3244.72,2200 U3.2 U3.1 ; S2.1 3217.76,2504.61 U3.1
OUT_L: C16.2 S2.3 U4.6 U4.7 | length 2859.8
  Top Layer w10: C16.2 5214.21,1990.32 5181.26,2023.27 5076.14,2023.27 5055.71,2043.71 5055.71,2083.19 5082.52,2110 U4.6 U4.7 5162.65,2160 5175.85,2173.2 5186.05,2173.2 5207.06,2194.21 v1(5217.89,2194.21)
  Bottom Layer w10: S2.3 3410,2102.72 3467.18,2045.54 3467.18,2010.18 3524.65,1952.72 3577.55,1952.72 3593.77,1936.5 4458.32,1936.5 4491.82,1970 4530.15,1970 4754.36,2194.21 v1(5217.89,2194.21)
Ref: C43.1 R19.1 R22.1 U9.5 | length 2680.4
  Top Layer w10: v1(3590,2625) R19.1 ; U9.5 5031.18,3002.4 5040,3011.22 R22.1 5050,3045 C43.1 5139.13,3045 5162,3022.12 v1(5165.55,3022.12)
  Bottom Layer w10: v1(3590,2625) 3688.04,2723.04 3688.04,2944.61 3778.43,3035 3811.57,3035 4012.5,2834.07 4012.5,2692.65 4205.15,2500 4388.28,2500 4609.69,2721.4 4609.69,2735.23 4618.47,2744.02 4894.71,2744.02 5165.55,3014.86 v1(5165.55,3022.12)
SIGNAL: R25.1 U1.7 U8.1 | length 354.1
  Top Layer w10: R25.1 3813.5,2723 3823.5,2733 R25.1@3823.5,2736.5 ; R25.1@3823.5,2721.5 3846.42,2744.42 3846.42,2773.19 3853.23,2780 3877.24,2780 3904.21,2780 3946.4,2822.19 3946.4,2891.71 3987.53,2932.83 3998.9,2932.83 U1.7
SWDIO: J2.3 U1.32 | length 221.2
  Top Layer w10: U1.32 4544.92,2984.92 J2.3
SWDLCK: J2.2 U1.31 | length 197.7
  Top Layer w10: U1.31 4601.61,2941.61 J2.2
V_BATT: C5.1 C32.1 C33.1 IC1.1 IC1.3 U2.3 | length 2322
  Top Layer w10: U2.3 4615,1655.86 4620.86,1650 4669.14,1650 4682.71,1663.57 4682.71,1717.55 4709.37,1744.21 C5.1 v1(4709.37,1794.37) ; C33.1 C32.1 5185,2396.38 5189.72,2401.1 C32.1@5192.72,2401.1 ; C32.1@5190.83,2400 IC1.3 5266.81,2406.81 5286.06,2406.81 5298.62,2419.38 5298.62,2455.43 ; v1(5266.81,2544.52) 5298.62,2512.71 5298.62,2501.71 ; 5298.62,2455.43 5298.62,2501.71 ; 5298.62,2455.43 5286.06,2467.99 5266.81,2467.99 IC1.1 5271.81,2474.8 5287.11,2490.1 5287.11,2490.2 5298.62,2501.71
  Bottom Layer w10: v1(4709.37,1794.37) 4753.74,1750 4869.14,1750 4875,1755.86 4875,2135 4882.2,2142.2 5384.27,2142.2 5515,2272.93 5515,2306.07 5276.54,2544.52 v1(5266.81,2544.52)
V_USB: C1.2 C2.2 C6.2 C8.2 C9.2 D1.A J1.A4 J1.A9 J1.B4 J1.B9 U1.22 U2.1 U2.2 | length 5195.3
  Top Layer w10: C8.2 4022.62,1934.21 4035.14,1921.69 4097.53,1921.69 4115.79,1903.43 4164.54,1903.43 ; v1(4069.08,1775.24) 4069.08,1764.42 4091.64,1741.86 4091.64,1731.12 J1.A4 ; C9.2 4205.31,1944.21 4164.54,1903.43 ; C9.2@4217.44,1932.09 4250.24,1899.29 4250.24,1862.4 4279.89,1832.74 4313.52,1832.74 ; v1(4230,2560) 4258.28,2531.72 4278.28,2531.72 C1.2 C2.2 ; J1.A9 4258.96,1731.12 4258.96,1736.91 4220.08,1775.79 4219.36,1775.79 4164.54,1830.62 4164.54,1903.43 ; C1.2@4290,2520.79 4378.82,2609.61 4378.82,2625.75 U1.22 ; D1.A 4311.22,1896.06 4311.22,1835.05 4313.52,1832.74 ; C6.2@4459.69,1715 4459.69,1678.88 4475,1663.57 ; v1(4525.31,1615.32) 4525.31,1663.57 ; U2.1 4575.31,1684.68 4575.31,1669.42 4569.46,1663.57 4525.31,1663.57 ; 4313.52,1832.74 4347.16,1832.74 4408.94,1770.96 4408.94,1681.32 4426.69,1663.57 4475,1663.57 ; 4475,1663.57 4525.31,1663.57
  Bottom Layer w10: v1(4069.08,1775.24) 4220.62,1775.24 4256.22,1739.65 4256.22,1738.06 4261.93,1732.35 J1.A9 ; v1(4230,2560) 4230,2770.43 3890.43,3110 3746.5,3110 3367.28,2730.78 3367.28,2081.8 3516.37,1932.72 3569.27,1932.72 3607.28,1894.7 3607.28,1872.31 3693.13,1786.46 4042.09,1786.46 4088.9,1739.65 4088.9,1651.25 4124.83,1615.32 v1(4525.31,1615.32)
VDD_3.3V: C3.2 C4.2 C12.2 C15.2 C22.2 C23.2 C24.2 C25.2 C26.2 C28.1 C35.1 C36.1 C37.1 C38.1 C44.1 C45.1 C46.2 C47.1 C49.1 IC1.5 J2.1 MK1.5 MK2.5 R13.1 U1.14 U3.8 U4.8 U5.8 U6.7 U7.7 U8.8 U9.3 U9.4 U10.7 | length 8381.9
  Top Layer w10: U3.8 3465.47,2250 3489.68,2274.21 C12.2 ; U8.8@3659.25,2780 U8.8@3682.76,2780 ; U7.7 U7.7@3925.85,2149.76 ; C36.1 C38.1 ; C24.2 C24.2@5170.79,2815.32
  Top Layer w15: v1(3489.68,2219.28) C12.2@3489.68,2274.21 ; v1(3664.68,2620.32) C46.2@3664.68,2684.21 ; U8.8 3669,2775 3664.68,2770.69 C46.2 C46.2@3664.68,2684.21 ; U10.7 3890.28,2520 3810.96,2599.31 3749.59,2599.31 C46.2@3664.68,2684.21 ; U7.7 3946.14,2143.09 3990.18,2187.13 4011.11,2187.13 C36.1 ; C23.2 4015.47,2345.32 4044.35,2374.19 4050.3,2374.19 4085.32,2409.21 C49.1 4085.32,2484.21 C47.1@4105.31,2504.21 ; U1.14 4047.42,2628.25 4047.42,2597.61 4068.22,2576.81 4068.22,2542.88 4105.31,2505.79 C47.1 C47.1@4105.31,2504.21 ; C38.1 4111.53,2197.15 4121.55,2207.17 4149.3,2207.17 4157.05,2214.91 v1(4166.52,2214.91) ; v1(4176.46,2445.6) 4178.3,2447.44 4178.3,2466.7 4142.83,2466.7 C47.1@4105.31,2504.21 ; C3.2 4475.31,2519.68 4475.31,2450.32 C4.2 v1(4535,2450) ; U6.7 4597.93,2235 4624.21,2208.72 C35.1 C37.1 ; J2.1@4703.19,2886.81 4729.59,2860.41 4729.59,2859 4769.21,2819.37 C45.1 C44.1 ; C37.1@4730.79,2208.72 4762.07,2240 4790,2240 v1@4820,2270 ; C22.2 4733.5,2349.02 4781.42,2301.1 4781.42,2270 v1@4820,2270 ; v1(4835,2285) v1@4820,2270 ; C44.1@4840.79,2819.37 4920.59,2899.17 U9.3 U9.4 5030.89,2927.6 5035,2923.48 C26.2 ; U5.8 4995.91,2739.61 4995.91,2777.01 5034.21,2815.32 C26.2 ; C15.2 5064.69,2227.83 5082.52,2210 U4.8 5113.8,2214.31 5140.77,2214.31 5160.68,2234.22 5173.53,2234.22 v1(5180.23,2240.92) ; C24.2 C25.2 C26.2 ; IC1.5 5370.24,2474.8 5374.55,2470.49 5374.55,2458.68 5398.23,2435 C28.1 5430,2434.21 5488.5,2375.71 5488.5,2352.5 R13.1 5488.5,2337.5 5488.5,2312.47 5475,2298.97 v1(5475,2289.5)
  Bottom Layer w15: v1(3664.68,2620.32) 3656.81,2620.32 3627.16,2590.66 3621.06,2590.66 3489.68,2459.29 v1(3489.68,2219.28) 3489.68,2019.5 3533.97,1975.22 3586.87,1975.22 3603.09,1959 3812.48,1959 3828.7,1975.22 ; MK2.5 3784.25,2183.88 3767.32,2183.88 3755.26,2171.82 3755.26,2099.72 3828.7,2026.27 3828.7,1975.22 ; v1(4166.52,2214.91) v1@4168.59,2214.91 ; v1(4176.46,2445.6) v1@4185,2445.6 ; MK1.5 4201.14,2182.36 v1@4168.59,2214.91 ; v1(4755,2615) 4747.66,2615 4679.18,2546.52 4665.9,2546.52 ; v1@4755,2625 4881.3,2625 U5.8 ; v1(5475,2289.5) 5426.42,2240.92 v1(5180.23,2240.92) 5136.15,2285 v1(4835,2285) 4787.05,2332.95 4622.5,2332.95 ; 3828.7,1975.22 4465.22,1975.22 4622.5,2132.5 4622.5,2332.95 ; v1@4168.59,2214.91 4169.39,2214.91 4223.13,2268.66 4223.13,2361.52 4185,2399.65 v1@4185,2445.6 ; v1@4185,2445.6 4245.23,2445.6 4257.13,2457.5 4316.43,2457.5 4325.54,2448.39 4445,2448.39 4543.13,2546.52 4665.9,2546.52 ; 4622.5,2332.95 4622.5,2362.5 v1(4535,2450) 4652.41,2450 4690.22,2487.8 4690.22,2522.2 4665.9,2546.52
VDD_-3.3V: C18.1 C19.2 C29.2 C30.2 C31.2 C39.1 C40.1 C41.1 C42.1 C48.2 C50.1 C51.1 U3.4 U4.4 U5.5 U6.4 U7.4 U8.4 U10.4 | length 6500.9
  Top Layer w10: U3.4 3244.72,2100 3317.17,2172.44 3317.17,2302.48 C18.1 3329.68,2315.79 3522.2,2508.31 3597.48,2508.31 3630,2475.79 C50.1 C51.1@3630,2385.47 ; v1(3674.3,2331.81) 3674.3,2339.6 3630,2383.9 C51.1@3630,2385.47 ; U10.4 3664.53,2420 C51.1@3630,2385.47 ; U7.4 3751.65,2043.09 3785,2009.74 v1(3785,2005) 3983.28,2005 C42.1 3987.65,2010.16 4020.17,2042.68 4076.65,2042.68 4109.95,2009.37 C40.1 ; v1(3795,2995) C48.2 3859.68,2994.21 3877.24,2976.65 U8.4 ; U6.4 4330,2018.55 4378.55,1970 4569.84,1970 C41.1@4624.21,2024.37 ; C41.1 C39.1 4742.52,2011.85 4769.65,2011.85 4790.5,1991 C19.2 4829.37,2024.37 4865,2060 ; U4.4@4881.22,2053.19 U4.4@4888.03,2060 ; U4.4 U4.4@4888.03,2060 ; C31.2 C30.2 C29.2 5034.21,2579.68 5021.69,2567.17 5021.69,2510.22 4961.3,2449.82 U5.5 4875,2318.7 4875,2240.07 4861.22,2226.29 4861.22,2063.78 4865,2060 ; 4865,2060 U4.4@4888.03,2060
  Bottom Layer w10: v1(3785,2005) 3783.28,2005 3760,1981.72 3703.43,1981.72 3703.22,1981.5 3612.41,1981.5 3596.19,1997.72 3549.15,1997.72 3543.29,2003.57 3543.29,2209.86 3665.24,2331.81 v1(3674.3,2331.81) 3674.3,2335.7 3579.07,2430.93 3579.07,2507.97 3651.41,2580.32 3681.25,2580.32 3795,2694.06 v1(3795,2995) 3992.5,2797.5 3992.5,2684.36 4196.86,2480 4444.79,2480 4619.79,2655 4869.16,2655 4922.28,2708.13 4922.28,2721.16 4945.14,2744.02 4977.46,2744.02 5000.31,2721.16 5000.31,2688.84 4966.48,2655 4956.12,2655 4922.28,2621.16 4922.28,2444.02 U5.5
pads on no net: J1.A6 J1.A7 J1.A8 J1.B6 J1.B7 J1.B8 MK1. MK2. U1.2 U1.3 U1.4 U1.5 U1.6 U1.8 U1.9 U1.10 U1.11 U1.12 U1.13 U1.15 U1.16 U1.17 U1.18 U1.19 U1.20 U1.21 U1.23 U1.24 U1.26 U1.27 U1.28 U1.29 U1.30 U1.33 U1.34 U1.35 U1.36 U1.38 U1.39 U1.40 U1.41 U1.42 U1.43 U1.44 U1.45 U1.46 U1.47 U1.48 U1.49 U1.50 U1.51 U1.52 U1.53 U1.54 U1.55 U2.4 U2.7 U2.9 U3.5 U3.6 U3.7 U5.1 U5.7 U8.5 U8.6 U8.7 U10.1 U10.8